# Altium PCB Motor_Driver_2021.PcbDoc
Units mm, origin at the board's own origin, x right, y up, seen from the top; angles counter-clockwise.
Board outline 30.03 x 14 mm, 2 copper layers (Top Layer, Bottom Layer); 22 components, 20 nets, 90 pads, 16 vias.
Unrouted connection lines stored in the file: 6.
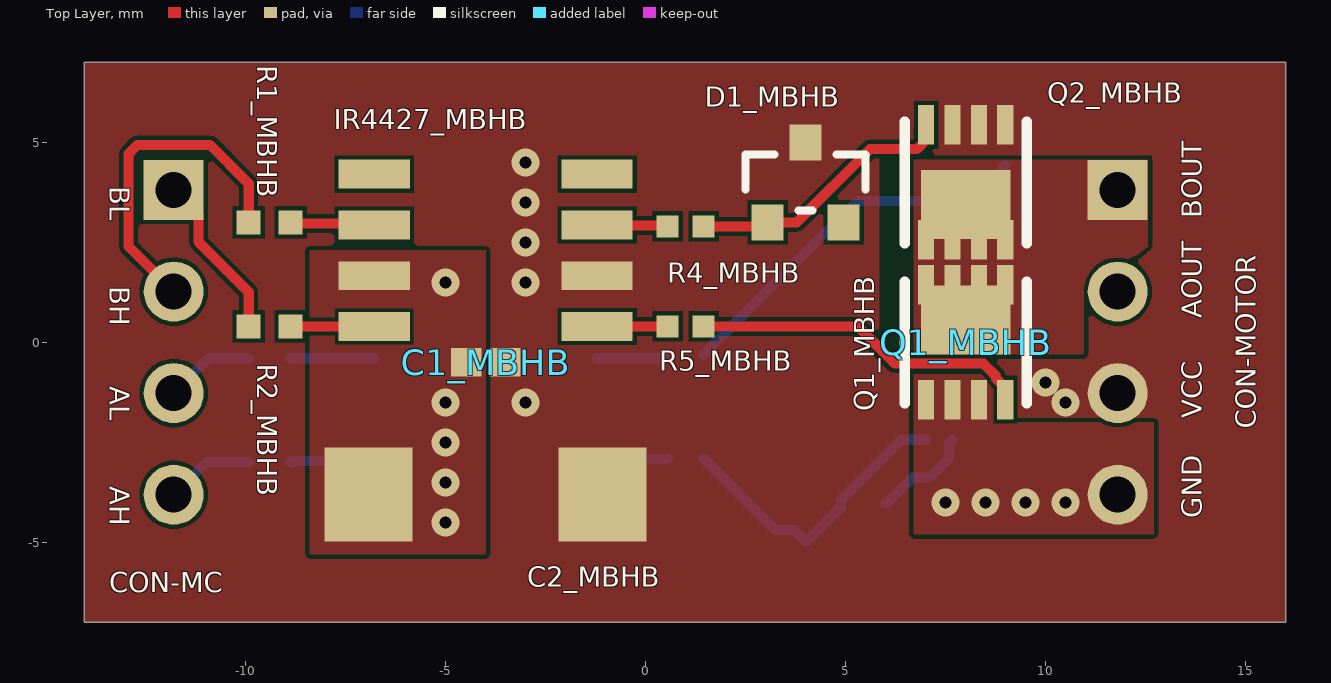
[diagram p0: Top Layer view]
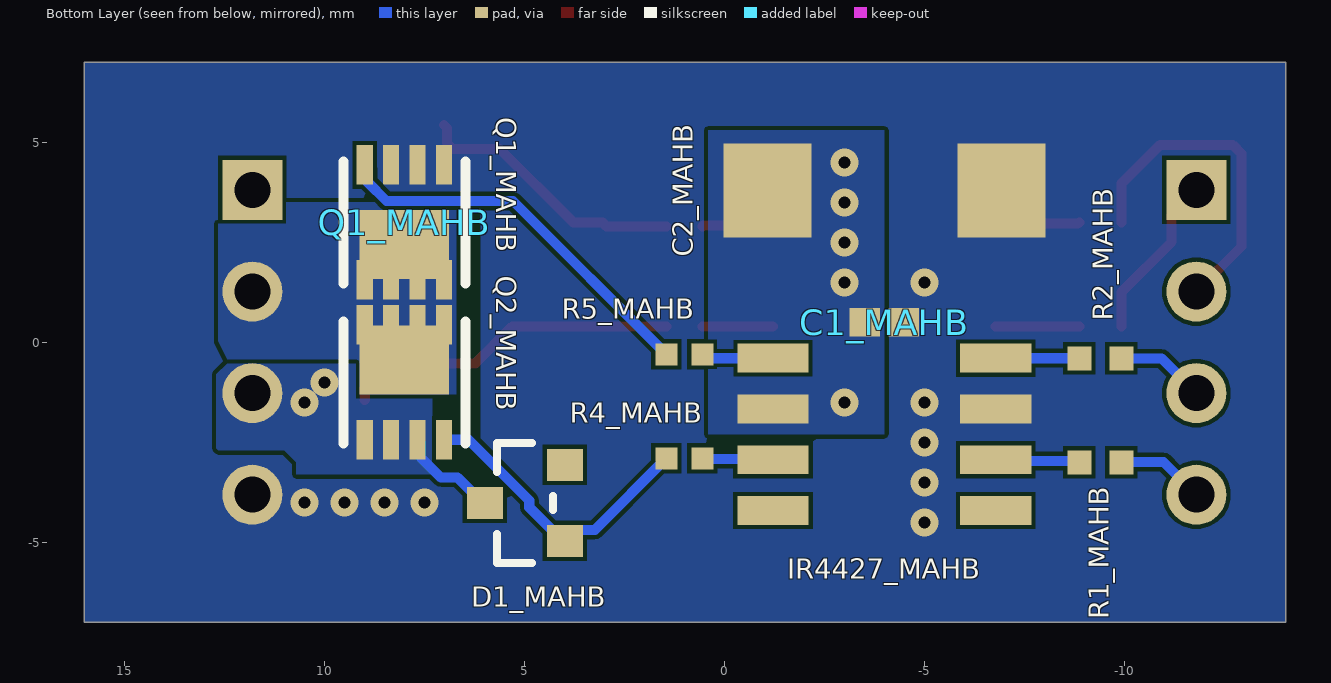
[diagram p1: Bottom Layer view, seen from below]
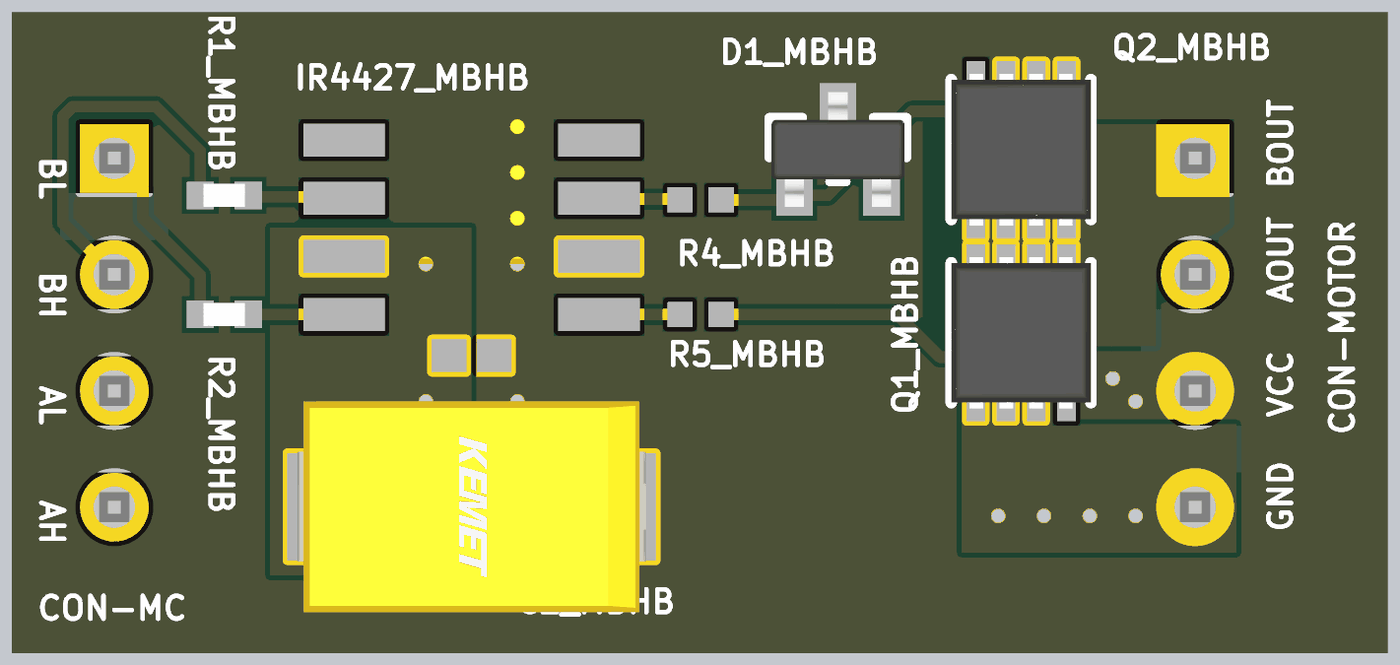
[diagram p2: 3D render of the assembled board from above, using the file's embedded part models]
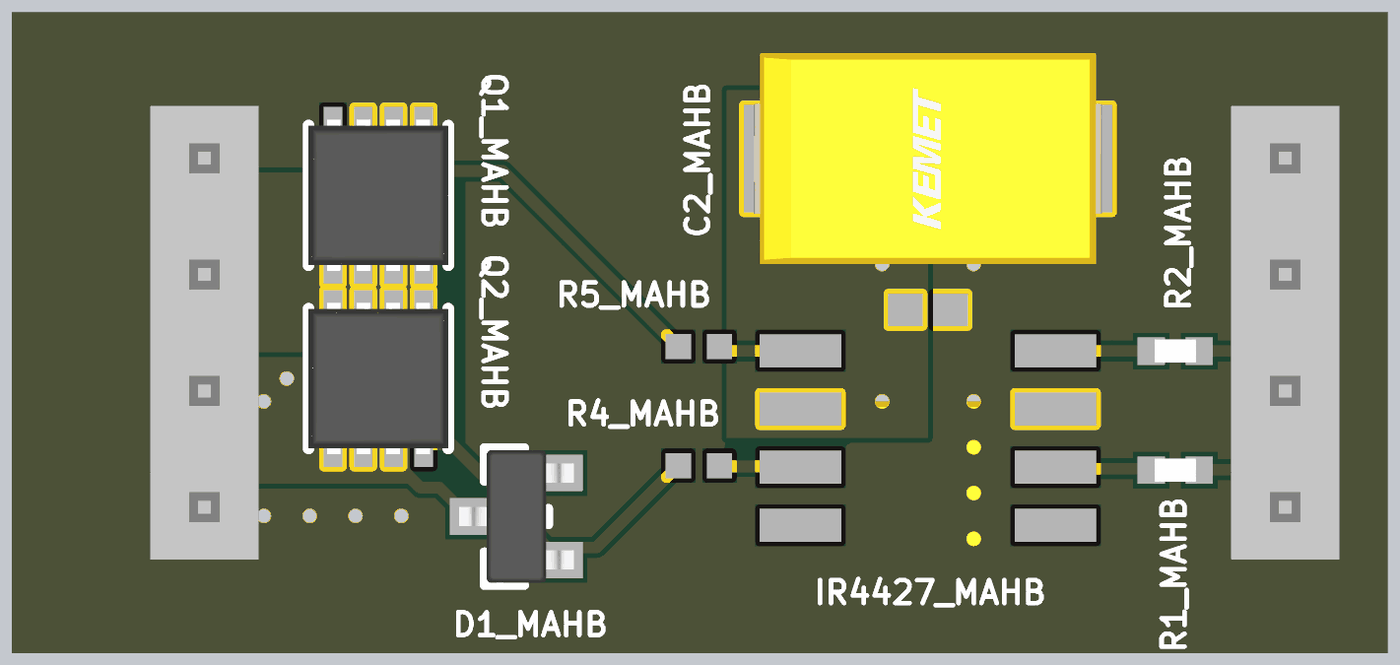
[diagram p3: 3D render of the assembled board from below, using the file's embedded part models]

## Layer stack, top to bottom
Top Solder: solder mask 0.0102, Solder Resist, Dk 3.5
Top Layer: signal copper 0.0356
Dielectric 1: dielectric 0.32, FR-4, Dk 4.8
Bottom Layer: signal copper 0.0356
Bottom Solder: solder mask 0.0102, Solder Resist, Dk 3.5

## Board outline
-14.035,7 -14.035,-7 16,-7 16,7

## Design rules (kind name [scope] priority, off if disabled: settings)
Clearance [All] p1: gap=0.1 ignorepadtopadclearanceinfootprint=TRUE
ComponentClearance [All] p1: gap=0 collisioncheckmode=3 verticalgap=0 showdistances=FALSE
HoleSize [All] p1: absolutevalues=TRUE maxlimit=3 minlimit=0.3 maxpercent=80.000 minpercent=20.000
MinimumAnnularRing [All] p1: minimumring=0.16
MinimumSolderMaskSliver MinimumSolderMaskSliver_pad_2 [(HasFootprint('RESC1005X40X25NL05T05') AND IsPad) vs (HasFootprint('RESC1005X40X25NL05T05') AND IsPad)] p1: minsoldermaskwidth=0
MinimumSolderMaskSliver MinimumSolderMaskSliver_pad_5 [(HasFootprint('SIS862DNT1GE3') AND IsPad) vs (HasFootprint('SIS862DNT1GE3') AND IsPad)] p2: minsoldermaskwidth=0
MinimumSolderMaskSliver MinimumSolderMaskSliver_pad [(HasFootprint('POWERPAK-1212-8') AND IsPad) vs (HasFootprint('POWERPAK-1212-8') AND IsPad)] p3: minsoldermaskwidth=0
MinimumSolderMaskSliver MinimumSolderMaskSliver_pad_1 [(HasFootprint('RESC1005X40X25LL05T05') AND IsPad) vs (HasFootprint('RESC1005X40X25LL05T05') AND IsPad)] p4: minsoldermaskwidth=0
MinimumSolderMaskSliver MinimumSolderMaskSliver_pad_3 [(HasFootprint('CAPC1050X55X23ML05T13') AND IsPad) vs (HasFootprint('CAPC1050X55X23ML05T13') AND IsPad)] p5: minsoldermaskwidth=0
MinimumSolderMaskSliver MinimumSolderMaskSliver_pad_4 [(HasFootprint('RESC1005X40N') AND IsPad) vs (HasFootprint('RESC1005X40N') AND IsPad)] p6: minsoldermaskwidth=0
MinimumSolderMaskSliver [All] p7: minsoldermaskwidth=0.2
PolygonConnect "Schematic Polygon Connect Style_1" [InNet('MAOUT')] p1: connectstyle=Direct reliefconductorwidth=0.254 reliefentries=4 polygonreliefangle="45 Angle" airgapwidth=0.254
PolygonConnect "Schematic Polygon Connect Style" [InNet('MBOUT')] p2: connectstyle=Direct reliefconductorwidth=0.254 reliefentries=4 polygonreliefangle="45 Angle" airgapwidth=0.254
PolygonConnect [All] p3: connectstyle=Direct reliefconductorwidth=0.254 reliefentries=4 polygonreliefangle="90 Angle" airgapwidth=0.254
RoutingVias [All] p1: holewidth=0.711 width=1 viastyle="Through Hole" minholewidth=0.711 minwidth=1 maxholewidth=0.711 maxwidth=1
SilkToSolderMaskClearance [IsPad] p1: minsilkscreentomaskgap=0.2 clearancetoexposedcopper=TRUE
SolderMaskExpansion SolderMaskExpansion_1 [IsVia] p1: expansion=0 istentingtop=TRUE
SolderMaskExpansion [All] p2: expansion=0.1 istentingtop=FALSE
Width [All] p1: maxlimit=0.254 minlimit=0.254 preferedwidth=0.254
26 further rules are at their usual default settings.

## Classes and differential pairs
channel class Half_Bridge: MAHB MBHB
component class Motor_Driver_2021: CON-MC CON-MOTOR
component class MBHB: C1_MBHB C2_MBHB D1_MBHB IR4427_MBHB Q1_MBHB Q2_MBHB R1_MBHB R2_MBHB R4_MBHB R5_MBHB
component class MAHB: C1_MAHB C2_MAHB D1_MAHB IR4427_MAHB Q1_MAHB Q2_MAHB R1_MAHB R2_MAHB R4_MAHB R5_MAHB

## Components (designator, comment, footprint, x,y, rotation, side; value= is the part's Value field where it differs from the comment)
C1_MAHB "CL05B104KO5NNNC" CAPC1050X55X23ML05T13 -4,0.5 r0 bottom (schematic designator C1)
C1_MBHB "CL05B104KO5NNNC" CAPC1050X55X23ML05T13 -4,-0.5 r0 top (schematic designator C1)
C2_MAHB "T491D475M050AT" KEMT-T491-D_L -4,3.8 r180 bottom (schematic designator C2)
C2_MBHB "T491D475M050AT" KEMT-T491-D_L -4,-3.8 r180 top (schematic designator C2)
CON-MC "22032041" 04x01_Conector_Male -11.8,0 r90 top
CON-MOTOR "22032041" 04x01_Conector_Male 11.8,0 r90 top
D1_MAHB "MMBZ5240B-7-F" Diodes_SOT23_0 4.987,-4.013 r90 bottom (schematic designator D1)
D1_MBHB "MMBZ5240B-7-F" Diodes_SOT23_0 4,4 r0 top (schematic designator D1)
IR4427_MAHB "IR4427STRPBF" IR4427-PCB -4,-2.3 r0 bottom (schematic designator IR4427)
IR4427_MBHB "IR4427STRPBF" IR4427-PCB -4,2.3 r0 top (schematic designator IR4427)
Q1_MAHB "Q1_MAHB" POWERPAK-1212-8 8,3 r270 bottom (schematic designator Q1)
Q1_MBHB "Q1_MBHB" POWERPAK-1212-8 8,0 r90 top (schematic designator Q1)
Q2_MAHB "SI7655DN-T1-GE3" POWERPAK-1212-8 8,-1 r90 bottom (schematic designator Q2)
Q2_MBHB "SI7655DN-T1-GE3" POWERPAK-1212-8 8,4 r270 top (schematic designator Q2)
R1_MAHB "CRCW0402330RFKED" FP-CRCW0402-e3-MFG -9.4,-3 r0 bottom (schematic designator R1)
R1_MBHB "CRCW0402330RFKED" FP-CRCW0402-e3-MFG -9.4,3 r0 top (schematic designator R1)
R2_MAHB "CRCW0402330RFKED" FP-CRCW0402-e3-MFG -9.4,-0.4 r0 bottom (schematic designator R2)
R2_MBHB "CRCW0402330RFKED" FP-CRCW0402-e3-MFG -9.4,0.4 r0 top (schematic designator R2)
R4_MAHB "ERJ-2RKF1500X" RESC1005X40X25NL05T05 1,-2.9 r0 bottom (schematic designator R4)
R4_MBHB "ERJ-2RKF1500X" RESC1005X40X25NL05T05 1,2.9 r0 top (schematic designator R4)
R5_MAHB "ERJ-2RKF1500X" RESC1005X40X25NL05T05 1,-0.3 r0 bottom (schematic designator R5)
R5_MBHB "ERJ-2RKF1500X" RESC1005X40X25NL05T05 1,0.4 r0 top (schematic designator R5)

## Footprints (in the part's own frame and the unit in brackets; to place one, negate y for a bottom-side part, rotate by r counter-clockwise, add the part's x,y. Pads: shape width x height; smd on the part's side, far side on the other; paste and mask are expansions set on the pad)
04x01_Conector_Male [mm] "0022032041"
  rect 1.5x1.5 hole 0.9: 1(3.81,0)
  round 1.5 hole 0.9: 2(1.27,0) 3(-1.27,0) 4(-3.81,0)
  body extent -4.95,-1.18 4.95,1.18, height 3.38
CAPC1050X55X23ML05T13 [mm] "Chip Capacitor, 2-Leads, Body 1.05x0.55mm, IPC Low Density"
  rect 0.76x0.72 smd: 1(-0.49,0) 2(0.49,0)
  body extent -0.53,-0.28 0.53,0.27, height 0.55
Diodes_SOT23_0 [mm]
  rect 0.8x0.9 smd paste+0 mask+0: 1(0,1) 2(-0.95,-1) 3(0.95,-1)
  silkscreen extent -1.5,-0.7 1.5,0.7, body extent -1.45,-1.25 1.45,1.25, height 1.04
FP-CRCW0402-e3-MFG [mm]
  rect 0.6x0.6 smd paste+0 mask+0: 1(-0.525,0) 2(0.525,0)
  body extent -0.5,-0.25 0.5,0.25, height 0.4
IR4427-PCB [mm] "SOIC, 8-Leads, Body 4,85x3,90mm, Pitch 1,27mm, IPC Medium Density"
  rect 1.78x0.72 smd: 1(-2.785,1.905) 2(-2.785,0.635) 3(-2.785,-0.635) 4(-2.785,-1.905) 5(2.785,-1.905) 6(2.785,-0.635) 7(2.785,0.635) 8(2.785,1.905)
  body extent -2,-2.45 2,2.45, height 1.75
KEMT-T491-D_L [mm] "Molded Capacitor, 2-Leads, Body 7.60x4.60mm, IPC High Density"
  rect 2.2x2.35 smd: 1(-2.925,0) 2(2.925,0)
  body extent -3.8,-2.3 3.8,2.3, height 3.1
POWERPAK-1212-8 [mm]
  rect 0.99x0.405 smd: 1(-1.435,0.99) 2(-1.435,0.33) 3(-1.435,-0.33) 4(-1.435,-0.99) 5(1.435,-0.99) 6(1.435,-0.33) 7(1.435,0.33) 8(1.435,0.99)
  rect 1.725x2.235 smd: 9(0.557,0)
  silkscreen extent -1.53,-1.53 1.53,1.53, body extent -1.66,-1.65 1.66,1.65, height 1.04
RESC1005X40X25NL05T05 [mm] "Chip Resistor, 2-Leads, Body 1.00x0.50mm, IPC Medium Density"
  rect 0.55x0.55 smd: 1(-0.45,0) 2(0.45,0)
  body extent -0.53,-0.27 0.53,0.28, height 0.4

## Part data
C1_MAHB C1_MBHB: library part CMP-2000-05439-1, "Chip Capacitor, 100 nF, +/- 10%, 16 V, -55 to 125 degC, 0402 (1005 Metric), RoHS, Tape and Reel", Capacitance=100000pF, Case Size/Dimension=0402, Dielectric=X7R, Manufacturer="Samsung Electro-Mechanics", Rated Voltage=16V, Tolerance (%)=±10%, Datasheet URL=https://datasheet.ciiva.com/29198/458718-da-01-en-vs-kondensator-0402-29198423.pdf, Datasheet Version=Nov-10, Manufacturer URL=http://www.samsungsem.com/global/index.jsp
C2_MAHB C2_MBHB: library part CMP-2000-07203-1, "Tantalum Surface Mount Capacitor, 4.7 uF, +/- 20%, 50 V, -55 to 125 degC, 2-Pin SMD, RoHS, Tape and Reel", Capacitance=4700000pF, Case Code=D, Case Style=Molded, Manufacturer=Kemet, Operating Temp Range=-55Cto125C, Package / Case=7343-31, Package Description="2-Pin Surface Mount Device, Body 7.3 x 4.3 mm", Package Reference=T491-D, Tolerance (+ or -)=20%, Voltage=50VDC, Construction=SMTChip, Datasheet URL=http://www.kemet.com/Lists/ProductCatalog/Attachments/254/KEM_T2005_T491.pdf, Datasheet Version=06/2016, DCL=2.4uA, DF=6%, ESR=1.4ohm, Failure Rate=NotRequired, Insulation=NotRequired, Lead Spacing (nom)=NotRequiredmm, Length W/Weld=NotRequiredmm, Length W/Weld (max)=NotRequiredmm, Manufacturer URL=http://www.kemet.com/, Mounting Style=SurfaceMount, Mounting Technology=SurfaceMount, Packaging=TapeandReel, Polarity=Polar, Product Depth (mm)=4.3mm, Product Diameter (mm)=NotRequiredmm, Product Height (mm)=2.8mm, Product Length (mm)=7.3mm, Rad Hardened=No, Seal=NotRequired, Seated Plane Height=NotRequiredmm, Wire Form=NotRequired
CON-MC CON-MOTOR: library part 04x01_Conector_Male-SCH, "CONN HEADER 4POS .100 VERT TIN"
IR4427_MAHB IR4427_MBHB: library part IR4427, "IC DRIVER DUAL LOW SIDE 8-DIP"
Q1_MAHB Q1_MBHB: library part SIS412DN-T1-GE3, "MOSFET (N-Channel)", Manufacturer_Name=Vishay, Mouser2 Part Number=781-SIS412DN-T1-GE3, Datasheet Link=https://componentsearchengine.com//SIS412DN-T1-GE3.pdf, Manufacturer_Part_Number=SIS412DN-T1-GE3, Mouser2 Price/Stock=https://www.mouser.com/Search/Refine.aspx?Keyword=781-SIS412DN-T1-GE3
Q2_MAHB Q2_MBHB: "MOSFET (P-Channel)", Manufacturer_Name=Vishay, Mouser Part Number=78-SI7655DN-T1-GE3, Arrow Part Number=SI7655DN-T1-GE3, Arrow Price/Stock=https://www.arrow.com/en/products/si7655dn-t1-ge3/vishay, Datasheet Link=https://www.vishay.com/docs/63617/si7655dn.pdf, Manufacturer_Part_Number=SI7655DN-T1-GE3, Mouser Price/Stock=https://www.mouser.co.uk/ProductDetail/Vishay-Semiconductors/SI7655DN-T1-GE3?qs=8YL4b%2FT9KqrUzqvG%2FOmMqw%3D%3D
R1_MAHB R1_MBHB R2_MAHB R2_MBHB: library part CMP-2002-08523-2, "RES Thick Film, 330Ω, 1%, 0.063W, 100ppm/°C, 0402", Case Code (Imperial)=0402, Case Code (Metric)=1005, Max Operating Temperature=155°C, Max Power Dissipation=63mW, Min Operating Temperature=-55°C, Package Quantity=10, Resistance=330R, Temperature Coefficient=100ppm/°C, Tolerance=1%, Voltage Rating=50V, Case/Package=0402, Composition="Thick Film", Contact Plating=Tin, Depth=0.5mm, Features="Automotive AEC-Q200", Height=0.35mm, Lead Free="Lead Free", Length=1mm, Military Standard=Not, Number of Terminations=2, Packaging="Tape and Reel", Power Rating=63mW, Radiation Hardening=No, Termination=SMD/SMT, Voltage Rating (DC)=50V, Weight=2.3E-05oz, Width=0.5mm
R4_MAHB R4_MBHB R5_MAHB R5_MBHB: library part CMP-1011-00415-2, Manufacturer=Panasonic, Part Number=ERJ-2RKF1500X

## Via types
v1: diameter 0.7, hole 0.3, Top Layer to Bottom Layer, tented both sides, 16 vias

## Nets (pads, with @x,y where several pads share a name; then routed paths per layer and width w, separated by ;. In a path a pad name is that pad's centre, name@x,y a point inside that pad or via, vN(x,y) a via of type N, cw(c..) or ccw(c..) an arc to the next point about the centre after c; other vN are vias at no path point)
GND: C1_MAHB.1 C1_MBHB.1 C2_MAHB.2 C2_MBHB.2 CON-MOTOR.4 IR4427_MAHB.3 IR4427_MBHB.3 Q1_MAHB.1 Q1_MAHB.2 Q1_MAHB.3 Q1_MBHB.1 Q1_MBHB.2 Q1_MBHB.3
  other v1: -5,-4.5 7.5,-4 8.5,-4 9.5,-4 10.5,-4 -5,-3.5 -5,-2.5 -5,-1.5 -5,1.5
MAHIN: CON-MC.4 R1_MAHB.1 | length 2.2
  Bottom Layer w0.254: CON-MC.4 -10.98,-2.99 -9.935,-2.99 R1_MAHB.1
MALIN: CON-MC.3 R2_MAHB.1 | length 2.2
  Bottom Layer w0.254: CON-MC.3 -10.93,-0.4 R2_MAHB.1
MAOUT: CON-MOTOR.2 Q1_MAHB.5 Q1_MAHB.6 Q1_MAHB.7 Q1_MAHB.8 Q1_MAHB.9 Q2_MAHB.5 Q2_MAHB.6 Q2_MAHB.7 Q2_MAHB.8 Q2_MAHB.9
MBHIN: CON-MC.2 R1_MBHB.1 | length 8.4
  Top Layer w0.254: CON-MC.2 -12.927,2.397 -12.927,4.716 -12.706,4.937 -10.894,4.937 -9.925,3.968 R1_MBHB.1
MBLIN: CON-MC.1 R2_MBHB.1 | length 4.2
  Top Layer w0.254: CON-MC.1 -11.177,3.187 -11.177,2.506 -9.925,1.254 R2_MBHB.1
MBOUT: CON-MOTOR.1 Q1_MBHB.5 Q1_MBHB.6 Q1_MBHB.7 Q1_MBHB.8 Q1_MBHB.9 Q2_MBHB.5 Q2_MBHB.6 Q2_MBHB.7 Q2_MBHB.8 Q2_MBHB.9
NetD1_MAHB_2: D1_MAHB.2 Q2_MAHB.4 R4_MAHB.2 | length 7.6
  Bottom Layer w0.254: R4_MAHB.2 3.241,-4.69 3.714,-4.69 D1_MAHB.2 4.037,-4.964 4.876,-4.124 4.876,-3.953 6.394,-2.435 Q2_MAHB.4
NetD1_MBHB_2: D1_MBHB.2 Q2_MBHB.4 R4_MBHB.2 | length 6.8
  Top Layer w0.254: R4_MBHB.2 2.95,2.9 D1_MBHB.2 3.779,3 5.615,4.836 6.786,4.836 6.934,4.984 6.934,5.359 Q2_MBHB.4
NetIR4427_MAHB_2: IR4427_MAHB.2 R1_MAHB.2 | length 2.1
  Bottom Layer w0.254: R1_MAHB.2 -8.842,-2.967 -6.817,-2.967 IR4427_MAHB.2
NetIR4427_MAHB_4: IR4427_MAHB.4 R2_MAHB.2 | length 2.1
  Bottom Layer w0.254: R2_MAHB.2 -8.872,-0.397 -6.787,-0.397 IR4427_MAHB.4
NetIR4427_MAHB_5: IR4427_MAHB.5 R5_MAHB.1 | length 1.8
  Bottom Layer w0.254: IR4427_MAHB.5@-1.213,-0.397 0.548,-0.397 R5_MAHB.1@0.55,-0.4
NetIR4427_MAHB_7: IR4427_MAHB.7 R4_MAHB.1 | length 1.8
  Bottom Layer w0.254: IR4427_MAHB.7@-1.198,-2.917 0.533,-2.917 R4_MAHB.1
NetIR4427_MBHB_2: IR4427_MBHB.2 R1_MBHB.2 | length 2.1
  Top Layer w0.254: R1_MBHB.2 -8.842,2.967 -6.817,2.967 IR4427_MBHB.2
NetIR4427_MBHB_4: IR4427_MBHB.4 R2_MBHB.2 | length 2.1
  Top Layer w0.254: R2_MBHB.2 -8.872,0.397 -6.787,0.397 IR4427_MBHB.4
NetIR4427_MBHB_5: IR4427_MBHB.5 R5_MBHB.1 | length 1.8
  Top Layer w0.254: IR4427_MBHB.5 -1.213,0.397 0.548,0.397 R5_MBHB.1
NetIR4427_MBHB_7: IR4427_MBHB.7 R4_MBHB.1 | length 1.8
  Top Layer w0.254: IR4427_MBHB.7 -1.198,2.917 0.533,2.917 R4_MBHB.1
NetQ1_MAHB_4: Q1_MAHB.4 R5_MAHB.2 | length 9.7
  Bottom Layer w0.254: R5_MAHB.2 5.282,3.532 8.446,3.532 8.914,4.001 8.914,4.359 Q1_MAHB.4
NetQ1_MBHB_4: Q1_MBHB.4 R5_MBHB.2 | length 8.5
  Top Layer w0.254: R5_MBHB.2 5.3,0.4 6.232,-0.532 8.446,-0.532 8.759,-0.846 8.759,-0.912 8.99,-1.143 Q1_MBHB.4
VCC: C1_MAHB.2 C1_MBHB.2 C2_MAHB.1 C2_MBHB.1 CON-MOTOR.3 D1_MAHB.1 D1_MBHB.1 IR4427_MAHB.6 IR4427_MBHB.6 Q2_MAHB.1 Q2_MAHB.2 Q2_MAHB.3 Q2_MBHB.1 Q2_MBHB.2 Q2_MBHB.3 | length 2.5
  Bottom Layer w0.254: D1_MAHB.1 6.037,-4.013 6.669,-3.381 7.082,-3.381 7.594,-2.869 7.594,-2.511 Q2_MAHB.3
  other v1: -3,-1.5 10.5,-1.5 10,-1 -3,1.5 -3,2.5 -3,3.5 -3,4.5
pads on no net: D1_MAHB.3 D1_MBHB.3 IR4427_MAHB.1 IR4427_MAHB.8 IR4427_MBHB.1 IR4427_MBHB.8

## Polygon pours and split planes (outlines as drawn)
VCC on Top Layer "VCC_L01_P010" (solid, pour order 10): -14.035,7 -14.035,-7 16,-7 16,7
MBOUT on Top Layer "MBOUT_L01_P001" (solid, pour order 1): 6.7,4.56 6.7,-0.3 10.95,-0.3 10.95,1.27 12.553,1.27 12.55,4.56
GND on Top Layer "GND_L01_P008" (solid, pour order 8): 6.7,-0.8 6.7,-4.8 12.7,-4.8 12.7,-2 8.7,-2 8.7,-0.8
GND on Top Layer "GND_L01_P007" (solid, pour order 7): -4,2.3 -4,-5.3 -8.4,-5.3 -8.4,2.3
GND on Bottom Layer "GND_L02_P011" (solid, pour order 11): -14.035,7 -14.035,-7 16,-7 16,7
MAOUT on Bottom Layer "MAOUT_L02_P006" (solid, pour order 6): 6.707,3.5 6.707,-1.3 12.65,-1.3 12.65,3.5
VCC on Bottom Layer "VCC_L02_P000" (solid, pour order 0): 11,-2.7 10.7,-3 10.7,-3.3 7.3,-3.3 7.3,-0.53 12.43,-0.53 12.7,-0.8 12.7,-2.65 12.65,-2.7
VCC on Bottom Layer "VCC_L02_P009" (solid, pour order 9): -4,-2.3 -4,5.3 0.4,5.3 0.4,-2.3

## Other copper
Top Layer:
  pour cut-out: 6.6,-0.45 5.85,-0.45 5.85,4.836 6.6,4.836
Bottom Layer:
  pour cut-out: 6.7,-2.435 6.1,-2.435 6.1,3.301 6.7,3.301

## Silkscreen, mask and mechanical layers (free items; w line width, h text height)
Top Overlay:
  text "BL" at -13.4,3.9 h0.5 r270
  text "BOUT" at 13.9,3.1 h0.5 r90
  text "BH" at -13.4,1.4 h0.5 r270
  text "AOUT" at 13.9,0.6 h0.5 r90
  text "AL" at -13.4,-1.1 h0.5 r270
  text "VCC" at 13.9,-1.9 h0.5 r90
  text "AH" at -13.4,-3.6 h0.5 r270
  text "GND" at 13.9,-4.4 h0.5 r90
Board Outline:
  the board outline again, w0.1